# EAGLE board untitled (EAGLE 5.01), part 1 of 2
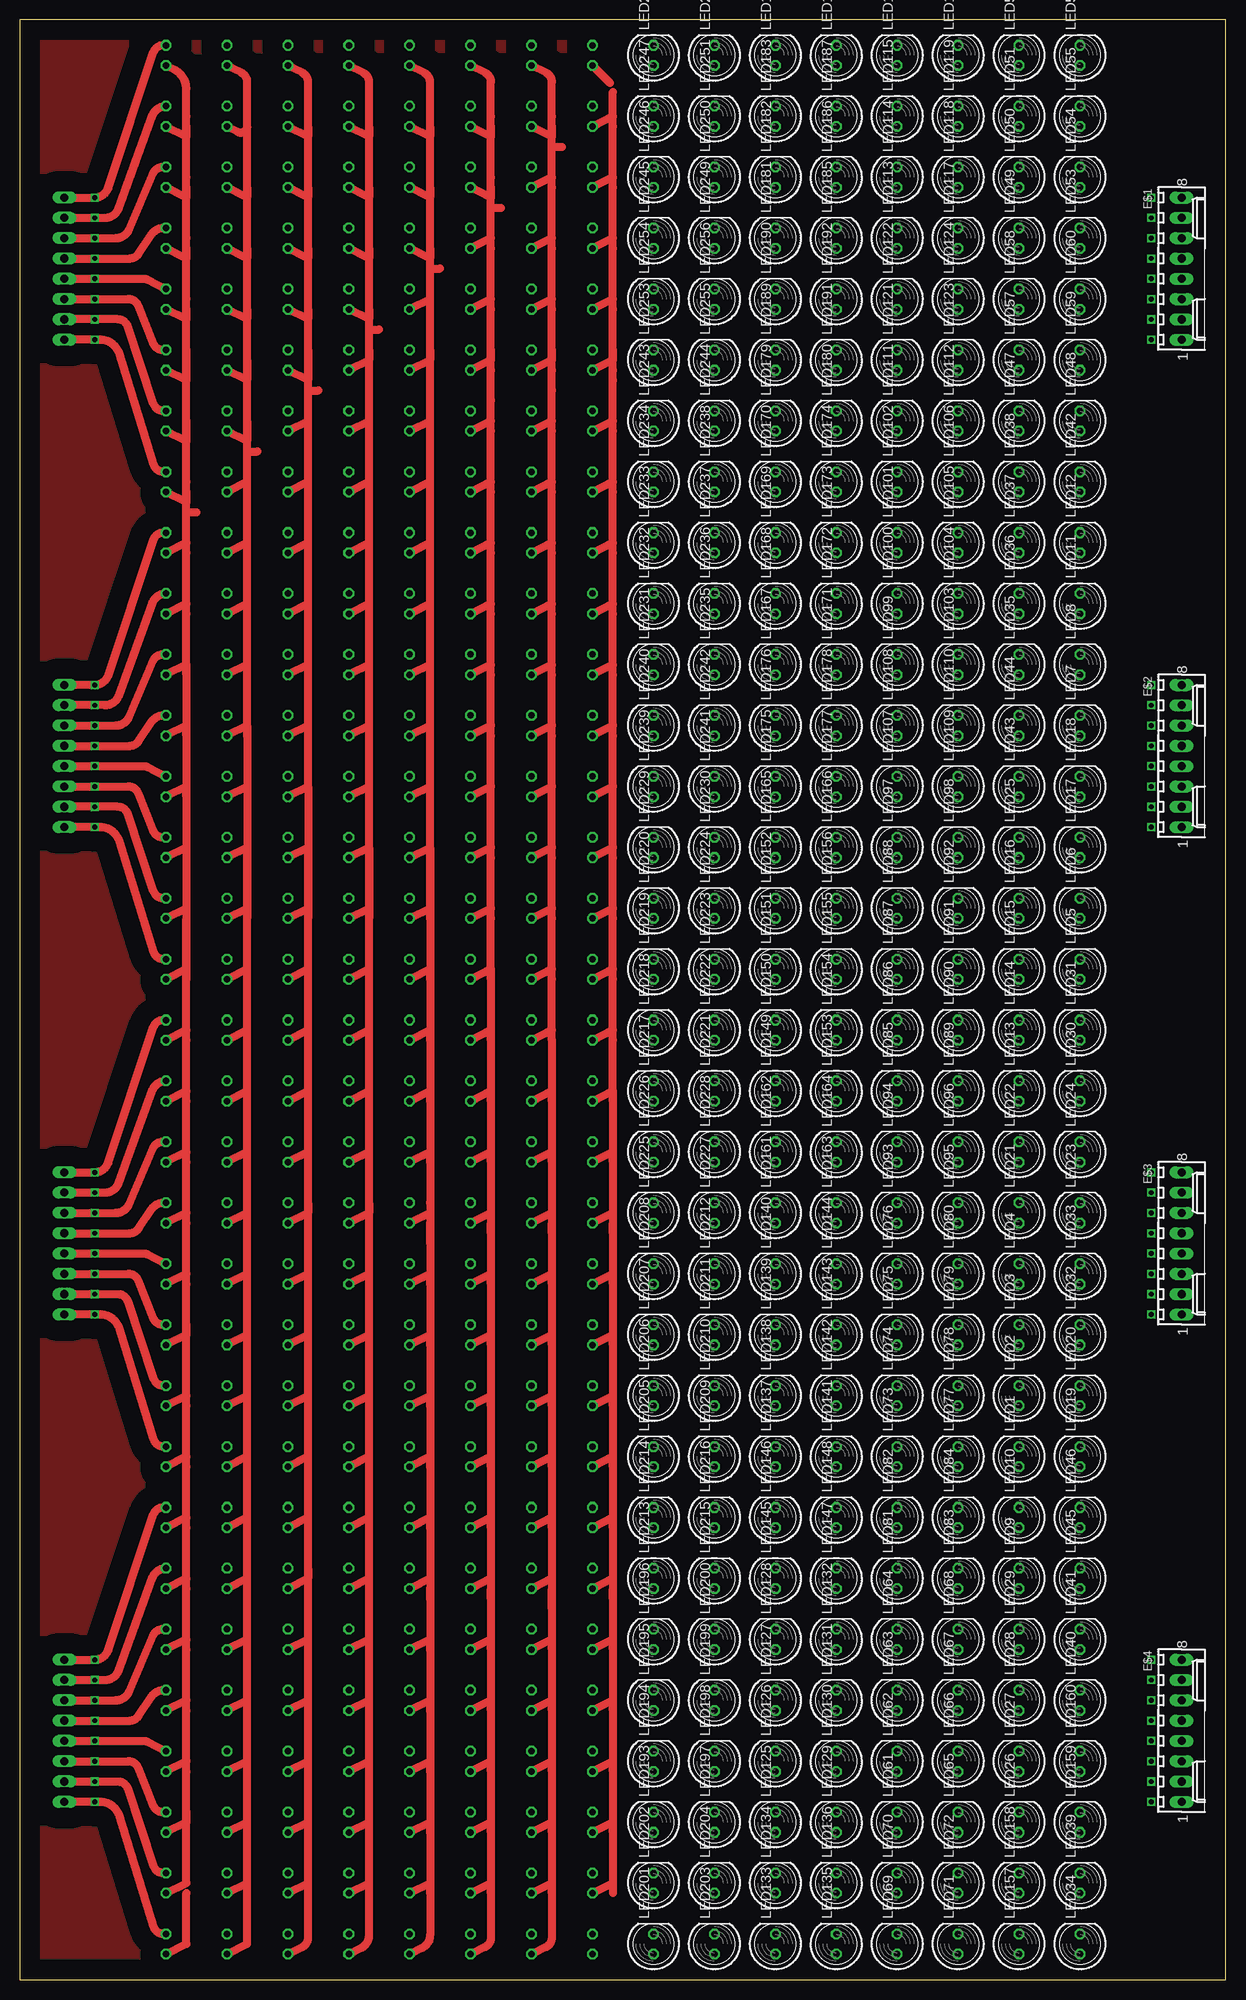
[diagram p0: board, top side]
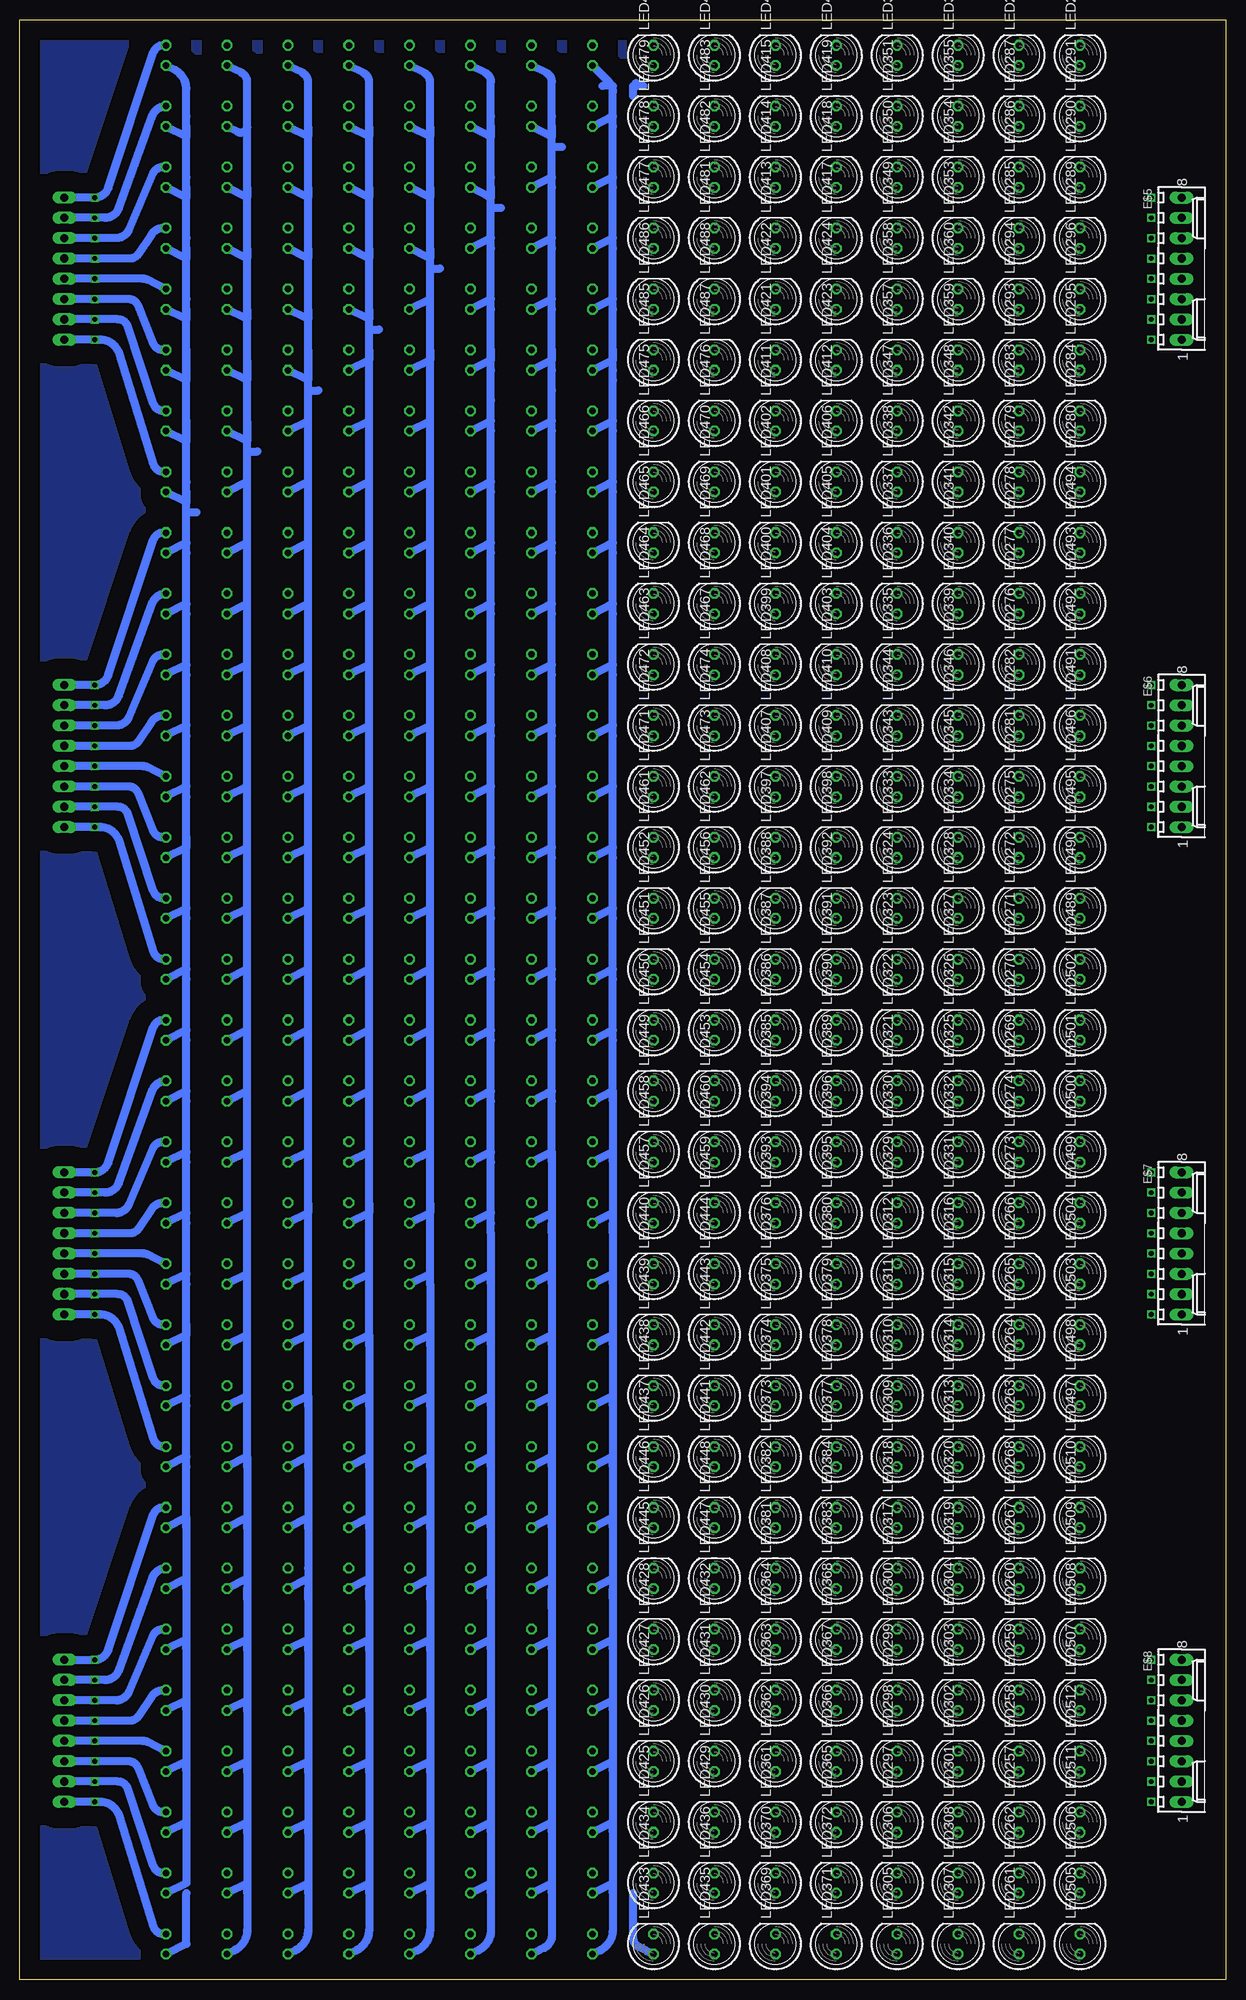
[diagram p1: board, bottom side, seen from below]

Size 150.8 x 245.09 mm. Coordinates in mm from the lower left corner, seen from the top.
Outline: 150.8,0 150.8,245.09 0,245.09 0,0 150.8,0
Copper layers (1*16): Top 0.035mm / dielectric 1.5mm / Bottom 0.035mm
Design rules "default *": minimum track width 40mil, minimum drill 24mil, track to track 8mil, track to pad 8mil, pad to pad 8mil, via to via 8mil, smd to smd 8mil, copper to edge 40mil, drill to drill 8mil, minimum pad ring 10mil, minimum via ring 8mil, stop-mask expansion 4mil, vias tented up to drill 0mil, thermal gap 10mil

## Footprints (pad centres in the part's own frame; a part is rotated, then mirrored left to right if it is on the bottom)
6410-08 = drill 1.016 long: 1 8.89,0; 2 6.35,0; 3 3.81,0; 4 1.27,0; 5 -1.27,0; 6 -3.81,0; 7 -6.35,0; 8 -8.89,0
LED5MM = drill 0.813 octagon: A -1.27,0; K 1.27,0

## Placement (x,y rotation side)
E$1  [6410-08]  145.25,213.99 270 top
E$2  [6410-08]  145.25,153.03 270 top
E$3  [6410-08]  145.25,92.07 270 top
E$4  [6410-08]  145.25,31.11 270 top
E$5  [6410-08]  5.55,213.99 270 bottom
E$6  [6410-08]  5.55,153.03 270 bottom
E$7  [6410-08]  5.55,92.07 270 bottom
E$8  [6410-08]  5.55,31.11 270 bottom
LED1  [LED5MM]  124.93,65.4 90 top
LED2  [LED5MM]  124.93,73.02 90 top
LED3  [LED5MM]  124.93,80.64 90 top
LED4  [LED5MM]  124.93,88.26 90 top
LED5  [LED5MM]  132.55,126.36 90 top
LED6  [LED5MM]  132.55,133.98 90 top
LED7  [LED5MM]  132.55,156.84 90 top
LED8  [LED5MM]  132.55,164.46 90 top
LED9  [LED5MM]  124.93,50.16 90 top
LED10  [LED5MM]  124.93,57.78 90 top
LED11  [LED5MM]  132.55,172.08 90 top
LED12  [LED5MM]  132.55,179.7 90 top
LED13  [LED5MM]  124.93,111.12 90 top
LED14  [LED5MM]  124.93,118.74 90 top
LED15  [LED5MM]  124.93,126.36 90 top
LED16  [LED5MM]  124.93,133.98 90 top
LED17  [LED5MM]  132.55,141.6 90 top
LED18  [LED5MM]  132.55,149.22 90 top
LED19  [LED5MM]  132.55,65.4 90 top
LED20  [LED5MM]  132.55,73.02 90 top
LED21  [LED5MM]  124.93,95.88 90 top
LED22  [LED5MM]  124.93,103.5 90 top
LED23  [LED5MM]  132.55,95.88 90 top
LED24  [LED5MM]  132.55,103.5 90 top
LED25  [LED5MM]  124.93,141.6 90 top
LED26  [LED5MM]  124.93,19.68 90 top
LED27  [LED5MM]  124.93,27.3 90 top
LED28  [LED5MM]  124.93,34.92 90 top
LED29  [LED5MM]  124.93,42.54 90 top
LED30  [LED5MM]  132.55,111.12 90 top
LED31  [LED5MM]  132.55,118.74 90 top
LED32  [LED5MM]  132.55,80.64 90 top
LED33  [LED5MM]  132.55,88.26 90 top
LED34  [LED5MM]  132.55,4.44 90 top
LED35  [LED5MM]  124.93,164.46 90 top
LED36  [LED5MM]  124.93,172.08 90 top
LED37  [LED5MM]  124.93,179.7 90 top
LED38  [LED5MM]  124.93,187.32 90 top
LED39  [LED5MM]  132.55,12.06 90 top
LED40  [LED5MM]  132.55,34.92 90 top
LED41  [LED5MM]  132.55,42.54 90 top
LED42  [LED5MM]  132.55,187.32 90 top
LED43  [LED5MM]  124.93,149.22 90 top
LED44  [LED5MM]  124.93,156.84 90 top
LED45  [LED5MM]  132.55,50.16 90 top
LED46  [LED5MM]  132.55,57.78 90 top
LED47  [LED5MM]  124.93,194.94 90 top
LED48  [LED5MM]  132.55,194.94 90 top
LED49  [LED5MM]  124.93,217.8 90 top
LED50  [LED5MM]  124.93,225.42 90 top
LED51  [LED5MM]  124.93,233.04 90 top
LED52  [LED5MM]  124.93,240.66 90 top
LED53  [LED5MM]  132.55,217.8 90 top
LED54  [LED5MM]  132.55,225.42 90 top
LED55  [LED5MM]  132.55,233.04 90 top
LED56  [LED5MM]  132.55,240.66 90 top
LED57  [LED5MM]  124.93,202.56 90 top
LED58  [LED5MM]  124.93,210.18 90 top
LED59  [LED5MM]  132.55,202.56 90 top
LED60  [LED5MM]  132.55,210.18 90 top
LED61  [LED5MM]  109.69,19.68 90 top
LED62  [LED5MM]  109.69,27.3 90 top
LED63  [LED5MM]  109.69,34.92 90 top
LED64  [LED5MM]  109.69,42.54 90 top
LED65  [LED5MM]  117.31,19.68 90 top
LED66  [LED5MM]  117.31,27.3 90 top
LED67  [LED5MM]  117.31,34.92 90 top
LED68  [LED5MM]  117.31,42.54 90 top
LED69  [LED5MM]  109.69,4.44 90 top
LED70  [LED5MM]  109.69,12.06 90 top
LED71  [LED5MM]  117.31,4.44 90 top
LED72  [LED5MM]  117.31,12.06 90 top
LED73  [LED5MM]  109.69,65.4 90 top
LED74  [LED5MM]  109.69,73.02 90 top
LED75  [LED5MM]  109.69,80.64 90 top
LED76  [LED5MM]  109.69,88.26 90 top
LED77  [LED5MM]  117.31,65.4 90 top
LED78  [LED5MM]  117.31,73.02 90 top
LED79  [LED5MM]  117.31,80.64 90 top
LED80  [LED5MM]  117.31,88.26 90 top
LED81  [LED5MM]  109.69,50.16 90 top
LED82  [LED5MM]  109.69,57.78 90 top
LED83  [LED5MM]  117.31,50.16 90 top
LED84  [LED5MM]  117.31,57.78 90 top
LED85  [LED5MM]  109.69,111.12 90 top
LED86  [LED5MM]  109.69,118.74 90 top
LED87  [LED5MM]  109.69,126.36 90 top
LED88  [LED5MM]  109.69,133.98 90 top
LED89  [LED5MM]  117.31,111.12 90 top
LED90  [LED5MM]  117.31,118.74 90 top
LED91  [LED5MM]  117.31,126.36 90 top
LED92  [LED5MM]  117.31,133.98 90 top
LED93  [LED5MM]  109.69,95.88 90 top
LED94  [LED5MM]  109.69,103.5 90 top
LED95  [LED5MM]  117.31,95.88 90 top
LED96  [LED5MM]  117.31,103.5 90 top
LED97  [LED5MM]  109.69,141.6 90 top
LED98  [LED5MM]  117.31,141.6 90 top
LED99  [LED5MM]  109.69,164.46 90 top
LED100  [LED5MM]  109.69,172.08 90 top
LED101  [LED5MM]  109.69,179.7 90 top
LED102  [LED5MM]  109.69,187.32 90 top
LED103  [LED5MM]  117.31,164.46 90 top
LED104  [LED5MM]  117.31,172.08 90 top
LED105  [LED5MM]  117.31,179.7 90 top
LED106  [LED5MM]  117.31,187.32 90 top
LED107  [LED5MM]  109.69,149.22 90 top
LED108  [LED5MM]  109.69,156.84 90 top
LED109  [LED5MM]  117.31,149.22 90 top
LED110  [LED5MM]  117.31,156.84 90 top
LED111  [LED5MM]  109.69,194.94 90 top
LED112  [LED5MM]  117.31,194.94 90 top
LED113  [LED5MM]  109.69,217.8 90 top
LED114  [LED5MM]  109.69,225.42 90 top
LED115  [LED5MM]  109.69,233.04 90 top
LED116  [LED5MM]  109.69,240.66 90 top
LED117  [LED5MM]  117.31,217.8 90 top
LED118  [LED5MM]  117.31,225.42 90 top
LED119  [LED5MM]  117.31,233.04 90 top
LED120  [LED5MM]  117.31,240.66 90 top
LED121  [LED5MM]  109.69,202.56 90 top
LED122  [LED5MM]  109.69,210.18 90 top
LED123  [LED5MM]  117.31,202.56 90 top
LED124  [LED5MM]  117.31,210.18 90 top
LED125  [LED5MM]  94.45,19.68 90 top
LED126  [LED5MM]  94.45,27.3 90 top
LED127  [LED5MM]  94.45,34.92 90 top
LED128  [LED5MM]  94.45,42.54 90 top
LED129  [LED5MM]  102.07,19.68 90 top
LED130  [LED5MM]  102.07,27.3 90 top
LED131  [LED5MM]  102.07,34.92 90 top
LED132  [LED5MM]  102.07,42.54 90 top
LED133  [LED5MM]  94.45,4.44 90 top
LED134  [LED5MM]  94.45,12.06 90 top
LED135  [LED5MM]  102.07,4.44 90 top
LED136  [LED5MM]  102.07,12.06 90 top
LED137  [LED5MM]  94.45,65.4 90 top
LED138  [LED5MM]  94.45,73.02 90 top
LED139  [LED5MM]  94.45,80.64 90 top
LED140  [LED5MM]  94.45,88.26 90 top
LED141  [LED5MM]  102.07,65.4 90 top
LED142  [LED5MM]  102.07,73.02 90 top
LED143  [LED5MM]  102.07,80.64 90 top
LED144  [LED5MM]  102.07,88.26 90 top
LED145  [LED5MM]  94.45,50.16 90 top
LED146  [LED5MM]  94.45,57.78 90 top
LED147  [LED5MM]  102.07,50.16 90 top
LED148  [LED5MM]  102.07,57.78 90 top
LED149  [LED5MM]  94.45,111.12 90 top
LED150  [LED5MM]  94.45,118.74 90 top
LED151  [LED5MM]  94.45,126.36 90 top
LED152  [LED5MM]  94.45,133.98 90 top
LED153  [LED5MM]  102.07,111.12 90 top
LED154  [LED5MM]  102.07,118.74 90 top
LED155  [LED5MM]  102.07,126.36 90 top
LED156  [LED5MM]  102.07,133.98 90 top
LED157  [LED5MM]  124.93,4.44 90 top
LED158  [LED5MM]  124.93,12.06 90 top
LED159  [LED5MM]  132.55,19.68 90 top
LED160  [LED5MM]  132.55,27.3 90 top
LED161  [LED5MM]  94.45,95.88 90 top
LED162  [LED5MM]  94.45,103.5 90 top
LED163  [LED5MM]  102.07,95.88 90 top
LED164  [LED5MM]  102.07,103.5 90 top
LED165  [LED5MM]  94.45,141.6 90 top
LED166  [LED5MM]  102.07,141.6 90 top
LED167  [LED5MM]  94.45,164.46 90 top
LED168  [LED5MM]  94.45,172.08 90 top
LED169  [LED5MM]  94.45,179.7 90 top
LED170  [LED5MM]  94.45,187.32 90 top
LED171  [LED5MM]  102.07,164.46 90 top
LED172  [LED5MM]  102.07,172.08 90 top
LED173  [LED5MM]  102.07,179.7 90 top
LED174  [LED5MM]  102.07,187.32 90 top
LED175  [LED5MM]  94.45,149.22 90 top
LED176  [LED5MM]  94.45,156.84 90 top
LED177  [LED5MM]  102.07,149.22 90 top
LED178  [LED5MM]  102.07,156.84 90 top
LED179  [LED5MM]  94.45,194.94 90 top
LED180  [LED5MM]  102.07,194.94 90 top
LED181  [LED5MM]  94.45,217.8 90 top
LED182  [LED5MM]  94.45,225.42 90 top
LED183  [LED5MM]  94.45,233.04 90 top
LED184  [LED5MM]  94.45,240.66 90 top
LED185  [LED5MM]  102.07,217.8 90 top
LED186  [LED5MM]  102.07,225.42 90 top
LED187  [LED5MM]  102.07,233.04 90 top
LED188  [LED5MM]  102.07,240.66 90 top
LED189  [LED5MM]  94.45,202.56 90 top
LED190  [LED5MM]  94.45,210.18 90 top
LED191  [LED5MM]  102.07,202.56 90 top
LED192  [LED5MM]  102.07,210.18 90 top
LED193  [LED5MM]  79.21,19.68 90 top
LED194  [LED5MM]  79.21,27.3 90 top
LED195  [LED5MM]  79.21,34.92 90 top
LED196  [LED5MM]  79.21,42.54 90 top
LED197  [LED5MM]  86.83,19.68 90 top
LED198  [LED5MM]  86.83,27.3 90 top
LED199  [LED5MM]  86.83,34.92 90 top
LED200  [LED5MM]  86.83,42.54 90 top
LED201  [LED5MM]  79.21,4.44 90 top
LED202  [LED5MM]  79.21,12.06 90 top
LED203  [LED5MM]  86.83,4.44 90 top
LED204  [LED5MM]  86.83,12.06 90 top
LED205  [LED5MM]  79.21,65.4 90 top
LED206  [LED5MM]  79.21,73.02 90 top
LED207  [LED5MM]  79.21,80.64 90 top
LED208  [LED5MM]  79.21,88.26 90 top
LED209  [LED5MM]  86.83,65.4 90 top
LED210  [LED5MM]  86.83,73.02 90 top
LED211  [LED5MM]  86.83,80.64 90 top
LED212  [LED5MM]  86.83,88.26 90 top
LED213  [LED5MM]  79.21,50.16 90 top
LED214  [LED5MM]  79.21,57.78 90 top
LED215  [LED5MM]  86.83,50.16 90 top
LED216  [LED5MM]  86.83,57.78 90 top
LED217  [LED5MM]  79.21,111.12 90 top
LED218  [LED5MM]  79.21,118.74 90 top
LED219  [LED5MM]  79.21,126.36 90 top
LED220  [LED5MM]  79.21,133.98 90 top
LED221  [LED5MM]  86.83,111.12 90 top
LED222  [LED5MM]  86.83,118.74 90 top
LED223  [LED5MM]  86.83,126.36 90 top
LED224  [LED5MM]  86.83,133.98 90 top
LED225  [LED5MM]  79.21,95.88 90 top
LED226  [LED5MM]  79.21,103.5 90 top
LED227  [LED5MM]  86.83,95.88 90 top
LED228  [LED5MM]  86.83,103.5 90 top
LED229  [LED5MM]  79.21,141.6 90 top
LED230  [LED5MM]  86.83,141.6 90 top
LED231  [LED5MM]  79.21,164.46 90 top
LED232  [LED5MM]  79.21,172.08 90 top
LED233  [LED5MM]  79.21,179.7 90 top
LED234  [LED5MM]  79.21,187.32 90 top
LED235  [LED5MM]  86.83,164.46 90 top
LED236  [LED5MM]  86.83,172.08 90 top
LED237  [LED5MM]  86.83,179.7 90 top
LED238  [LED5MM]  86.83,187.32 90 top
LED239  [LED5MM]  79.21,149.22 90 top
LED240  [LED5MM]  79.21,156.84 90 top
LED241  [LED5MM]  86.83,149.22 90 top
LED242  [LED5MM]  86.83,156.84 90 top
LED243  [LED5MM]  79.21,194.94 90 top
LED244  [LED5MM]  86.83,194.94 90 top
LED245  [LED5MM]  79.21,217.8 90 top
LED246  [LED5MM]  79.21,225.42 90 top
LED247  [LED5MM]  79.21,233.04 90 top
LED248  [LED5MM]  79.21,240.66 90 top
LED249  [LED5MM]  86.83,217.8 90 top
LED250  [LED5MM]  86.83,225.42 90 top
LED251  [LED5MM]  86.83,233.04 90 top
LED252  [LED5MM]  86.83,240.66 90 top
LED253  [LED5MM]  79.21,202.56 90 top
LED254  [LED5MM]  79.21,210.18 90 top
LED255  [LED5MM]  86.83,202.56 90 top
LED256  [LED5MM]  86.83,210.18 90 top
LED257  [LED5MM]  25.87,19.68 90 bottom
LED258  [LED5MM]  25.87,27.3 90 bottom
LED259  [LED5MM]  25.87,34.92 90 bottom
LED260  [LED5MM]  25.87,42.54 90 bottom
LED261  [LED5MM]  25.87,4.44 90 bottom
LED262  [LED5MM]  25.87,12.06 90 bottom
LED263  [LED5MM]  25.87,65.4 90 bottom
LED264  [LED5MM]  25.87,73.02 90 bottom
LED265  [LED5MM]  25.87,80.64 90 bottom
LED266  [LED5MM]  25.87,88.26 90 bottom
LED267  [LED5MM]  25.87,50.16 90 bottom
LED268  [LED5MM]  25.87,57.78 90 bottom
LED269  [LED5MM]  25.87,111.12 90 bottom
LED270  [LED5MM]  25.87,118.74 90 bottom
LED271  [LED5MM]  25.87,126.36 90 bottom
LED272  [LED5MM]  25.87,133.98 90 bottom
LED273  [LED5MM]  25.87,95.88 90 bottom
LED274  [LED5MM]  25.87,103.5 90 bottom
LED275  [LED5MM]  25.87,141.6 90 bottom
LED276  [LED5MM]  25.87,164.46 90 bottom
LED277  [LED5MM]  25.87,172.08 90 bottom
LED278  [LED5MM]  25.87,179.7 90 bottom
LED279  [LED5MM]  25.87,187.32 90 bottom
LED280  [LED5MM]  18.25,187.32 90 bottom
LED281  [LED5MM]  25.87,149.22 90 bottom
LED282  [LED5MM]  25.87,156.84 90 bottom
LED283  [LED5MM]  25.87,194.94 90 bottom
LED284  [LED5MM]  18.25,194.94 90 bottom
LED285  [LED5MM]  25.87,217.8 90 bottom
LED286  [LED5MM]  25.87,225.42 90 bottom
LED287  [LED5MM]  25.87,233.04 90 bottom
LED288  [LED5MM]  25.87,240.66 90 bottom
LED289  [LED5MM]  18.25,217.8 90 bottom
LED290  [LED5MM]  18.25,225.42 90 bottom
LED291  [LED5MM]  18.25,233.04 90 bottom
LED292  [LED5MM]  18.25,240.66 90 bottom
LED293  [LED5MM]  25.87,202.56 90 bottom
LED294  [LED5MM]  25.87,210.18 90 bottom
LED295  [LED5MM]  18.25,202.56 90 bottom
LED296  [LED5MM]  18.25,210.18 90 bottom
LED297  [LED5MM]  41.11,19.68 90 bottom
LED298  [LED5MM]  41.11,27.3 90 bottom
LED299  [LED5MM]  41.11,34.92 90 bottom
LED300  [LED5MM]  41.11,42.54 90 bottom
LED301  [LED5MM]  33.49,19.68 90 bottom
LED302  [LED5MM]  33.49,27.3 90 bottom
LED303  [LED5MM]  33.49,34.92 90 bottom
LED304  [LED5MM]  33.49,42.54 90 bottom
LED305  [LED5MM]  41.11,4.44 90 bottom
LED306  [LED5MM]  41.11,12.06 90 bottom
LED307  [LED5MM]  33.49,4.44 90 bottom
LED308  [LED5MM]  33.49,12.06 90 bottom
LED309  [LED5MM]  41.11,65.4 90 bottom
LED310  [LED5MM]  41.11,73.02 90 bottom
LED311  [LED5MM]  41.11,80.64 90 bottom
LED312  [LED5MM]  41.11,88.26 90 bottom
LED313  [LED5MM]  33.49,65.4 90 bottom
LED314  [LED5MM]  33.49,73.02 90 bottom
LED315  [LED5MM]  33.49,80.64 90 bottom
LED316  [LED5MM]  33.49,88.26 90 bottom
LED317  [LED5MM]  41.11,50.16 90 bottom
LED318  [LED5MM]  41.11,57.78 90 bottom
LED319  [LED5MM]  33.49,50.16 90 bottom
LED320  [LED5MM]  33.49,57.78 90 bottom
LED321  [LED5MM]  41.11,111.12 90 bottom
LED322  [LED5MM]  41.11,118.74 90 bottom
LED323  [LED5MM]  41.11,126.36 90 bottom
LED324  [LED5MM]  41.11,133.98 90 bottom
LED325  [LED5MM]  33.49,111.12 90 bottom
LED326  [LED5MM]  33.49,118.74 90 bottom
LED327  [LED5MM]  33.49,126.36 90 bottom
LED328  [LED5MM]  33.49,133.98 90 bottom
LED329  [LED5MM]  41.11,95.88 90 bottom
LED330  [LED5MM]  41.11,103.5 90 bottom
LED331  [LED5MM]  33.49,95.88 90 bottom
LED332  [LED5MM]  33.49,103.5 90 bottom
LED333  [LED5MM]  41.11,141.6 90 bottom
LED334  [LED5MM]  33.49,141.6 90 bottom
LED335  [LED5MM]  41.11,164.46 90 bottom
LED336  [LED5MM]  41.11,172.08 90 bottom
LED337  [LED5MM]  41.11,179.7 90 bottom
LED338  [LED5MM]  41.11,187.32 90 bottom
LED339  [LED5MM]  33.49,164.46 90 bottom
LED340  [LED5MM]  33.49,172.08 90 bottom
LED341  [LED5MM]  33.49,179.7 90 bottom
LED342  [LED5MM]  33.49,187.32 90 bottom
LED343  [LED5MM]  41.11,149.22 90 bottom
LED344  [LED5MM]  41.11,156.84 90 bottom
LED345  [LED5MM]  33.49,149.22 90 bottom
LED346  [LED5MM]  33.49,156.84 90 bottom
LED347  [LED5MM]  41.11,194.94 90 bottom
LED348  [LED5MM]  33.49,194.94 90 bottom
LED349  [LED5MM]  41.11,217.8 90 bottom
LED350  [LED5MM]  41.11,225.42 90 bottom
LED351  [LED5MM]  41.11,233.04 90 bottom
LED352  [LED5MM]  41.11,240.66 90 bottom
LED353  [LED5MM]  33.49,217.8 90 bottom
LED354  [LED5MM]  33.49,225.42 90 bottom
LED355  [LED5MM]  33.49,233.04 90 bottom
LED356  [LED5MM]  33.49,240.66 90 bottom
LED357  [LED5MM]  41.11,202.56 90 bottom
LED358  [LED5MM]  41.11,210.18 90 bottom
LED359  [LED5MM]  33.49,202.56 90 bottom
LED360  [LED5MM]  33.49,210.18 90 bottom
LED361  [LED5MM]  56.35,19.68 90 bottom
LED362  [LED5MM]  56.35,27.3 90 bottom
LED363  [LED5MM]  56.35,34.92 90 bottom
LED364  [LED5MM]  56.35,42.54 90 bottom
LED365  [LED5MM]  48.73,19.68 90 bottom
LED366  [LED5MM]  48.73,27.3 90 bottom
LED367  [LED5MM]  48.73,34.92 90 bottom
LED368  [LED5MM]  48.73,42.54 90 bottom
LED369  [LED5MM]  56.35,4.44 90 bottom
LED370  [LED5MM]  56.35,12.06 90 bottom
LED371  [LED5MM]  48.73,4.44 90 bottom
LED372  [LED5MM]  48.73,12.06 90 bottom
LED373  [LED5MM]  56.35,65.4 90 bottom
LED374  [LED5MM]  56.35,73.02 90 bottom
LED375  [LED5MM]  56.35,80.64 90 bottom
LED376  [LED5MM]  56.35,88.26 90 bottom
LED377  [LED5MM]  48.73,65.4 90 bottom
LED378  [LED5MM]  48.73,73.02 90 bottom
LED379  [LED5MM]  48.73,80.64 90 bottom
LED380  [LED5MM]  48.73,88.26 90 bottom
LED381  [LED5MM]  56.35,50.16 90 bottom
LED382  [LED5MM]  56.35,57.78 90 bottom
LED383  [LED5MM]  48.73,50.16 90 bottom
LED384  [LED5MM]  48.73,57.78 90 bottom
LED385  [LED5MM]  56.35,111.12 90 bottom
LED386  [LED5MM]  56.35,118.74 90 bottom
LED387  [LED5MM]  56.35,126.36 90 bottom
LED388  [LED5MM]  56.35,133.98 90 bottom
LED389  [LED5MM]  48.73,111.12 90 bottom
LED390  [LED5MM]  48.73,118.74 90 bottom
LED391  [LED5MM]  48.73,126.36 90 bottom
LED392  [LED5MM]  48.73,133.98 90 bottom
LED393  [LED5MM]  56.35,95.88 90 bottom
LED394  [LED5MM]  56.35,103.5 90 bottom
LED395  [LED5MM]  48.73,95.88 90 bottom
LED396  [LED5MM]  48.73,103.5 90 bottom
LED397  [LED5MM]  56.35,141.6 90 bottom
LED398  [LED5MM]  48.73,141.6 90 bottom
LED399  [LED5MM]  56.35,164.46 90 bottom
LED400  [LED5MM]  56.35,172.08 90 bottom
LED401  [LED5MM]  56.35,179.7 90 bottom
LED402  [LED5MM]  56.35,187.32 90 bottom
LED403  [LED5MM]  48.73,164.46 90 bottom
LED404  [LED5MM]  48.73,172.08 90 bottom
LED405  [LED5MM]  48.73,179.7 90 bottom
LED406  [LED5MM]  48.73,187.32 90 bottom
LED407  [LED5MM]  56.35,149.22 90 bottom
LED408  [LED5MM]  56.35,156.84 90 bottom
LED409  [LED5MM]  48.73,149.22 90 bottom
LED410  [LED5MM]  48.73,156.84 90 bottom
LED411  [LED5MM]  56.35,194.94 90 bottom
LED412  [LED5MM]  48.73,194.94 90 bottom
LED413  [LED5MM]  56.35,217.8 90 bottom
LED414  [LED5MM]  56.35,225.42 90 bottom
LED415  [LED5MM]  56.35,233.04 90 bottom
LED416  [LED5MM]  56.35,240.66 90 bottom
LED417  [LED5MM]  48.73,217.8 90 bottom
LED418  [LED5MM]  48.73,225.42 90 bottom
LED419  [LED5MM]  48.73,233.04 90 bottom
LED420  [LED5MM]  48.73,240.66 90 bottom
LED421  [LED5MM]  56.35,202.56 90 bottom
LED422  [LED5MM]  56.35,210.18 90 bottom
LED423  [LED5MM]  48.73,202.56 90 bottom
LED424  [LED5MM]  48.73,210.18 90 bottom
LED425  [LED5MM]  71.59,19.68 90 bottom
LED426  [LED5MM]  71.59,27.3 90 bottom
LED427  [LED5MM]  71.59,34.92 90 bottom
LED428  [LED5MM]  71.59,42.54 90 bottom
LED429  [LED5MM]  63.97,19.68 90 bottom
LED430  [LED5MM]  63.97,27.3 90 bottom
LED431  [LED5MM]  63.97,34.92 90 bottom
LED432  [LED5MM]  63.97,42.54 90 bottom
LED433  [LED5MM]  71.59,4.44 90 bottom
LED434  [LED5MM]  71.59,12.06 90 bottom
LED435  [LED5MM]  63.97,4.44 90 bottom
LED436  [LED5MM]  63.97,12.06 90 bottom
LED437  [LED5MM]  71.59,65.4 90 bottom
LED438  [LED5MM]  71.59,73.02 90 bottom
LED439  [LED5MM]  71.59,80.64 90 bottom
LED440  [LED5MM]  71.59,88.26 90 bottom
LED441  [LED5MM]  63.97,65.4 90 bottom
LED442  [LED5MM]  63.97,73.02 90 bottom
LED443  [LED5MM]  63.97,80.64 90 bottom
LED444  [LED5MM]  63.97,88.26 90 bottom
LED445  [LED5MM]  71.59,50.16 90 bottom
LED446  [LED5MM]  71.59,57.78 90 bottom
LED447  [LED5MM]  63.97,50.16 90 bottom
LED448  [LED5MM]  63.97,57.78 90 bottom
LED449  [LED5MM]  71.59,111.12 90 bottom
LED450  [LED5MM]  71.59,118.74 90 bottom
LED451  [LED5MM]  71.59,126.36 90 bottom
LED452  [LED5MM]  71.59,133.98 90 bottom
LED453  [LED5MM]  63.97,111.12 90 bottom
LED454  [LED5MM]  63.97,118.74 90 bottom
LED455  [LED5MM]  63.97,126.36 90 bottom
LED456  [LED5MM]  63.97,133.98 90 bottom
LED457  [LED5MM]  71.59,95.88 90 bottom
LED458  [LED5MM]  71.59,103.5 90 bottom
LED459  [LED5MM]  63.97,95.88 90 bottom
LED460  [LED5MM]  63.97,103.5 90 bottom
LED461  [LED5MM]  71.59,141.6 90 bottom
LED462  [LED5MM]  63.97,141.6 90 bottom
LED463  [LED5MM]  71.59,164.46 90 bottom
LED464  [LED5MM]  71.59,172.08 90 bottom
LED465  [LED5MM]  71.59,179.7 90 bottom
LED466  [LED5MM]  71.59,187.32 90 bottom
LED467  [LED5MM]  63.97,164.46 90 bottom
LED468  [LED5MM]  63.97,172.08 90 bottom
LED469  [LED5MM]  63.97,179.7 90 bottom
LED470  [LED5MM]  63.97,187.32 90 bottom
LED471  [LED5MM]  71.59,149.22 90 bottom
LED472  [LED5MM]  71.59,156.84 90 bottom
LED473  [LED5MM]  63.97,149.22 90 bottom
LED474  [LED5MM]  63.97,156.84 90 bottom
LED475  [LED5MM]  71.59,194.94 90 bottom
LED476  [LED5MM]  63.97,194.94 90 bottom
LED477  [LED5MM]  71.59,217.8 90 bottom
LED478  [LED5MM]  71.59,225.42 90 bottom
LED479  [LED5MM]  71.59,233.04 90 bottom
LED480  [LED5MM]  71.59,240.66 90 bottom
LED481  [LED5MM]  63.97,217.8 90 bottom
LED482  [LED5MM]  63.97,225.42 90 bottom
LED483  [LED5MM]  63.97,233.04 90 bottom
LED484  [LED5MM]  63.97,240.66 90 bottom
LED485  [LED5MM]  71.59,202.56 90 bottom
LED486  [LED5MM]  71.59,210.18 90 bottom
LED487  [LED5MM]  63.97,202.56 90 bottom
LED488  [LED5MM]  63.97,210.18 90 bottom
LED489  [LED5MM]  18.25,126.36 90 bottom
LED490  [LED5MM]  18.25,133.98 90 bottom
LED491  [LED5MM]  18.25,156.84 90 bottom
LED492  [LED5MM]  18.25,164.46 90 bottom
LED493  [LED5MM]  18.25,172.08 90 bottom
LED494  [LED5MM]  18.25,179.7 90 bottom
LED495  [LED5MM]  18.25,141.6 90 bottom
LED496  [LED5MM]  18.25,149.22 90 bottom
LED497  [LED5MM]  18.25,65.4 90 bottom
LED498  [LED5MM]  18.25,73.02 90 bottom
LED499  [LED5MM]  18.25,95.88 90 bottom
LED500  [LED5MM]  18.25,103.5 90 bottom
LED501  [LED5MM]  18.25,111.12 90 bottom
LED502  [LED5MM]  18.25,118.74 90 bottom
LED503  [LED5MM]  18.25,80.64 90 bottom
LED504  [LED5MM]  18.25,88.26 90 bottom
LED505  [LED5MM]  18.25,4.44 90 bottom
LED506  [LED5MM]  18.25,12.06 90 bottom
LED507  [LED5MM]  18.25,34.92 90 bottom
LED508  [LED5MM]  18.25,42.54 90 bottom
LED509  [LED5MM]  18.25,50.16 90 bottom
LED510  [LED5MM]  18.25,57.78 90 bottom
LED511  [LED5MM]  18.25,19.68 90 bottom
LED512  [LED5MM]  18.25,27.3 90 bottom

## Library data of the parts
E$1-E$8 = con-molex
LED1-LED512 = led

## Nets
S$1: LED1.A LED2.A LED3.A LED4.A LED9.A LED10.A LED13.A LED14.A LED15.A LED16.A LED21.A LED22.A LED26.A LED27.A LED28.A LED29.A LED157.A LED158.A
S$3: E$1.1 LED42.K
S$4: E$1.8 LED56.K
S$6: E$1.7 LED55.K
S$7: LED25.A LED35.A LED36.A LED37.A LED38.A LED43.A LED44.A
S$9: E$1.5 LED53.K
S$10: E$1.6 LED54.K
S$11: LED47.A LED49.A LED50.A LED51.A LED52.A LED57.A LED58.A
S$13: E$1.2 LED48.K
S$14: E$1.4 LED60.K
S$15: LED61.A LED62.A LED63.A LED64.A LED69.A LED70.A LED73.A LED74.A LED75.A LED76.A LED81.A LED82.A LED85.A LED86.A LED87.A LED88.A LED93.A LED94.A
S$17: E$1.3 LED59.K
S$18: E$2.8 LED12.K
S$19: E$2.7 LED11.K
S$20: E$2.6 LED8.K
S$21: LED97.A LED99.A LED100.A LED101.A LED102.A LED107.A LED108.A
S$23: E$2.4 LED18.K
S$24: E$2.3 LED17.K
S$25: LED111.A LED113.A LED114.A LED115.A LED116.A LED121.A LED122.A
S$27: E$2.1 LED5.K
S$28: E$2.5 LED7.K
S$29: LED125.A LED126.A LED127.A LED128.A LED133.A LED134.A LED137.A LED138.A LED139.A LED140.A LED145.A LED146.A LED149.A LED150.A LED151.A LED152.A LED161.A LED162.A
S$31: E$2.2 LED6.K
S$35: LED165.A LED167.A LED168.A LED169.A LED170.A LED175.A LED176.A
S$37: E$3.8 LED31.K
S$38: E$3.7 LED30.K
S$39: LED179.A LED181.A LED182.A LED183.A LED184.A LED189.A LED190.A
S$41: E$3.6 LED24.K
S$42: E$3.4 LED33.K
S$43: LED257.A LED258.A LED259.A LED260.A LED261.A LED262.A LED263.A LED264.A LED265.A LED266.A LED267.A LED268.A LED269.A LED270.A LED271.A LED272.A LED273.A LED274.A
S$45: E$3.3 LED32.K
S$46: E$3.1 LED19.K
S$47: E$3.5 LED23.K
S$48: E$3.2 LED20.K
S$49: LED229.A LED231.A LED232.A LED233.A LED234.A LED239.A LED240.A
S$53: LED243.A LED245.A LED246.A LED247.A LED248.A LED253.A LED254.A
S$56: E$4.8 LED46.K
S$57: E$4.7 LED45.K
S$58: E$4.6 LED41.K
S$59: E$4.4 LED160.K
S$60: E$4.3 LED159.K
S$61: E$4.1 LED34.K
S$62: E$4.5 LED40.K
S$63: E$4.2 LED39.K
S$66: LED275.A LED276.A LED277.A LED278.A LED279.A LED281.A LED282.A
S$67: LED283.A LED285.A LED286.A LED287.A LED288.A LED293.A LED294.A
S$68: LED297.A LED298.A LED299.A LED300.A LED305.A LED306.A LED309.A LED310.A LED311.A LED312.A LED317.A LED318.A LED321.A LED322.A LED323.A LED324.A LED329.A LED330.A
S$70: LED333.A LED335.A LED336.A LED337.A LED338.A LED343.A LED344.A
S$72: LED347.A LED349.A LED350.A LED351.A LED352.A LED357.A LED358.A
S$74: LED361.A LED362.A LED363.A LED364.A LED369.A LED370.A LED373.A LED374.A LED375.A LED376.A LED381.A LED382.A LED385.A LED386.A LED387.A LED388.A LED393.A LED394.A
S$76: LED397.A LED399.A LED400.A LED401.A LED402.A LED407.A LED408.A
S$78: LED411.A LED413.A LED414.A LED415.A LED416.A LED421.A LED422.A
S$81: LED461.A LED463.A LED464.A LED465.A LED466.A LED471.A LED472.A
S$83: LED475.A LED477.A LED478.A LED479.A LED485.A LED486.A
S$84: LED193.A LED194.A LED195.A LED196.A LED201.A LED202.A LED205.A LED206.A LED207.A LED208.A LED213.A LED214.A LED217.A LED218.A LED219.A LED220.A LED225.A LED226.A
S$87: E$5.8 LED292.K
S$88: E$5.7 LED291.K
S$89: E$5.6 LED290.K
S$90: E$5.4 LED296.K
S$91: E$5.3 LED295.K
S$92: E$5.1 LED280.K
S$93: E$5.5 LED289.K
S$94: E$5.2 LED284.K
S$98: E$6.8 LED494.K
S$99: E$6.7 LED493.K
S$100: E$6.6 LED492.K
S$101: E$6.4 LED496.K
S$102: E$6.3 LED495.K
S$103: E$6.1 LED489.K
S$104: E$6.5 LED491.K
S$105: E$6.2 LED490.K
S$109: E$7.8 LED502.K
S$110: E$7.7 LED501.K
S$111: E$7.6 LED500.K
S$112: E$7.4 LED504.K
S$113: E$7.3 LED503.K
S$114: E$7.1 LED497.K
S$115: E$7.5 LED499.K
S$116: E$7.2 LED498.K
S$120: E$8.8 LED510.K
S$121: E$8.7 LED509.K
S$122: E$8.6 LED508.K
S$123: E$8.4 LED512.K
S$124: E$8.3 LED511.K
S$125: E$8.1 LED505.K
S$126: E$8.5 LED507.K
S$127: E$8.2 LED506.K
S$130: LED425.A LED426.A LED427.A LED428.A LED434.A LED437.A LED438.A LED439.A LED440.A LED445.A LED446.A LED449.A LED450.A LED451.A LED452.A LED457.A LED458.A
S$133: LED433.A
S$134: LED480.A